# Altium PCB x-IMU3-SA-A8.PcbDoc
Units mm, origin at the board's own origin, x right, y up, seen from the top; angles counter-clockwise.
Board outline 27 x 12.5 mm, 2 copper layers (Top Layer, Bottom Layer), stack 1.569 mm thick; 14 components, 25 nets, 68 pads, 15 vias.
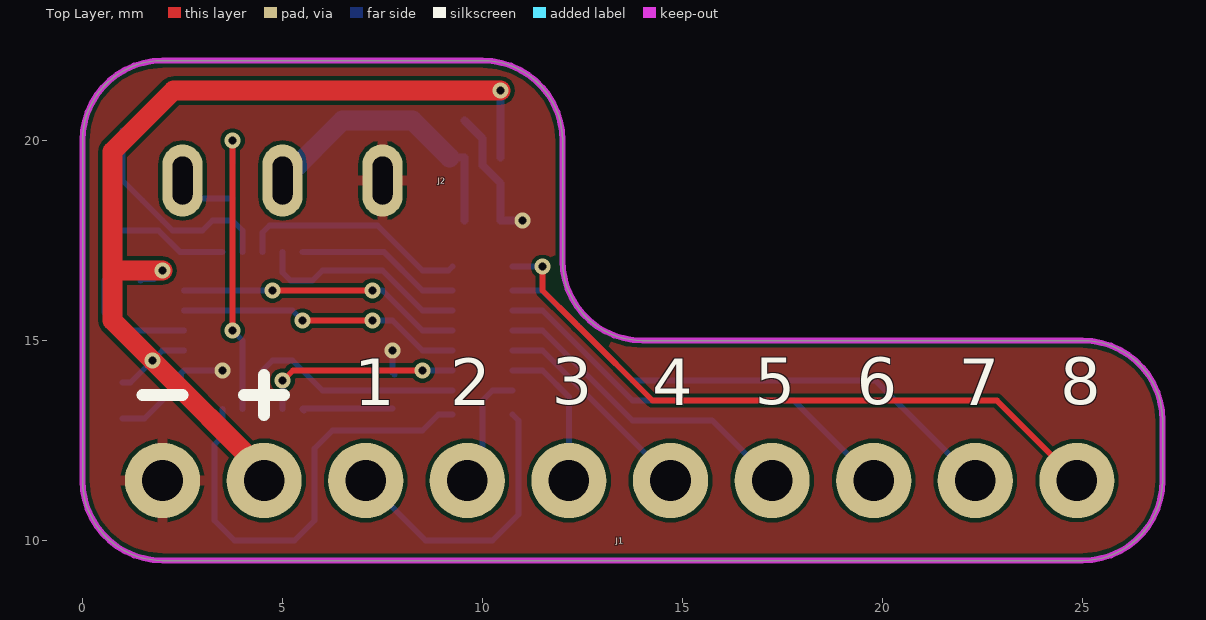
[diagram p0: Top Layer view]
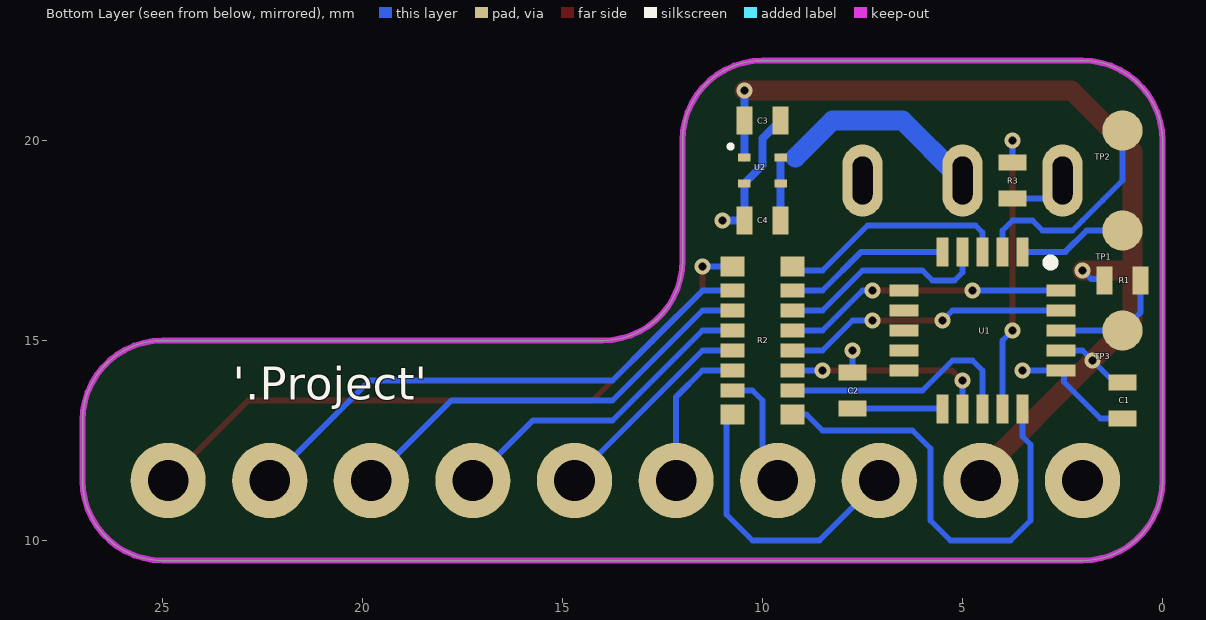
[diagram p1: Bottom Layer view, seen from below]
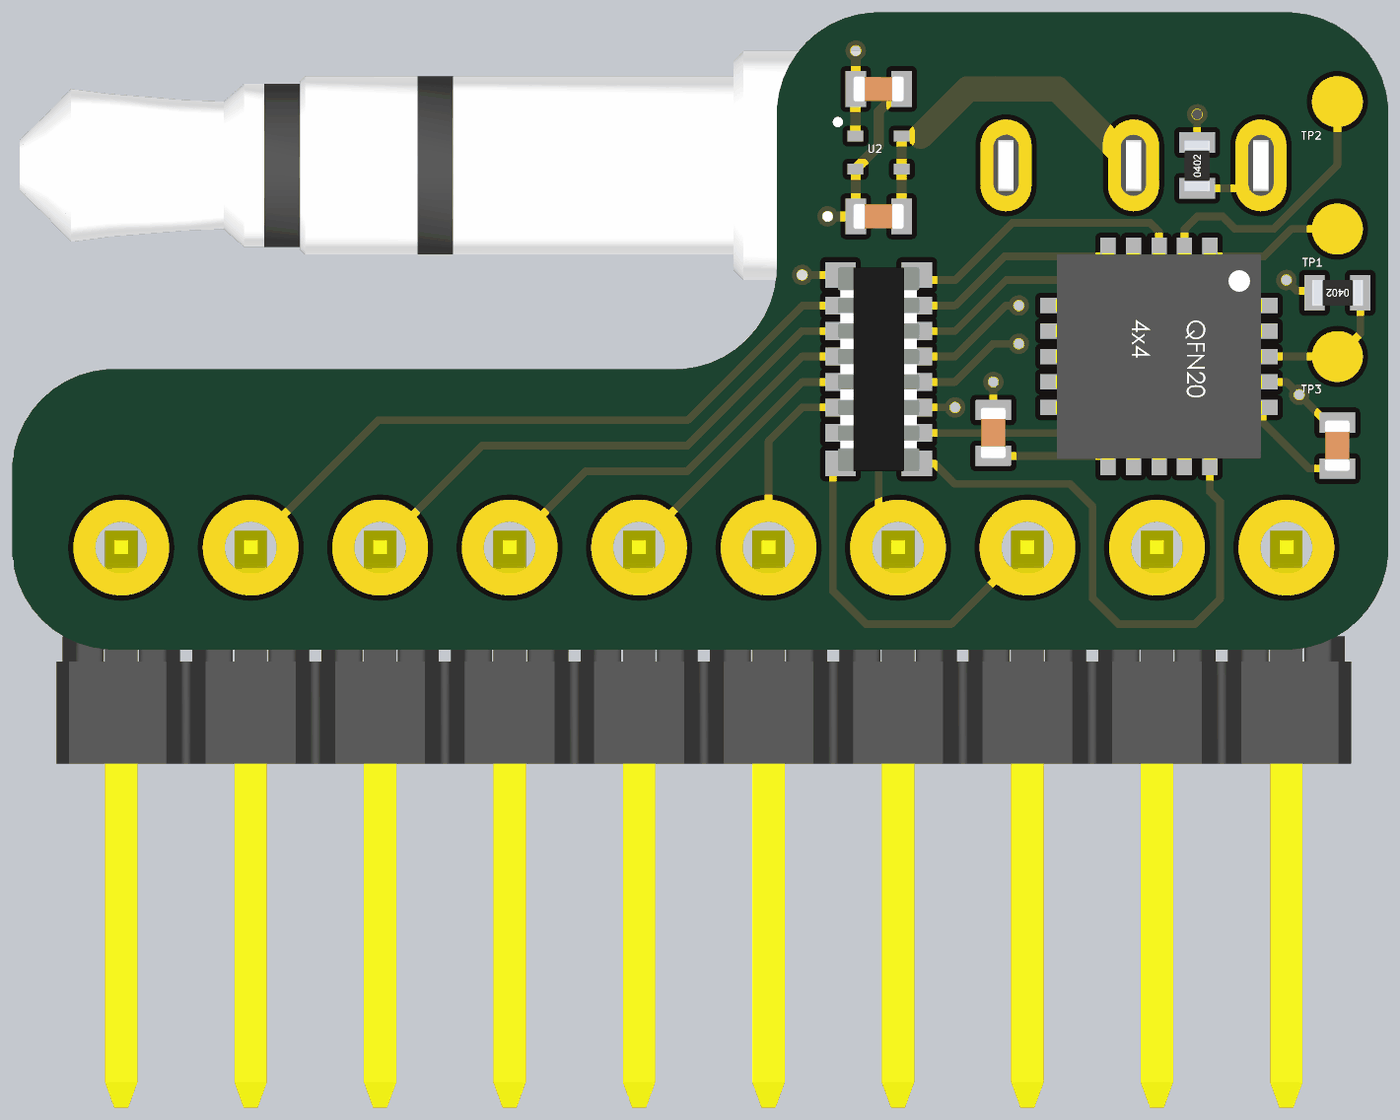
[diagram p2: 3D render of the assembled board from below, using the file's embedded part models]

## Layer stack, top to bottom
Top Solder: solder mask 0.0254, SM-001, Dk 4
Top Layer: signal copper 0.035
Dielectric 1: core 1.4986, Core-043, Dk 4.3
Bottom Layer: signal copper 0.035
Bottom Solder: solder mask 0.0254, SM-001, Dk 4

## Board outline
0,11.5 0,20 cw(c2,20) 2,22 10,22 cw(c10,20) 12,20 12,17 ccw(c14,17) 14,15 25,15 cw(c25,13) 27,13 27,11.5 cw(c25,11.5) 25,9.5 2,9.5 cw(c2,11.5)

## Design rules (kind name [scope] priority, off if disabled: settings)
Clearance [All] p1: gap=0.1 ignorepadtopadclearanceinfootprint=FALSE except(0: Arc-Hole Track-Hole SMDPad-Hole THPad-Hole Via-Hole Fill-Hole Poly-Hole Region-Hole Text-Hole)
DiffPairsRouting [All] p1: maxlimit=0.254 minlimit=0.1 mostfreqgap=0.1 toplayer_minwidth=0.1 toplayer_maxwidth=0.381 toplayer_prefwidth=0.1 bottomlayer_minwidth=0.1 bottomlayer_maxwidth=0.381 bottomlayer_prefwidth=0.1 maxuncoupledlength=12.7
MinimumSolderMaskSliver [All] p1: minsoldermaskwidth=0
PlaneClearance [All] p1: clearance=0.2
PlaneConnect [All] p1: planeconnectstyle=Direct reliefexpansion=0.508 reliefentries=4 reliefconductorwidth=0.254 reliefairgap=0.254
PolygonConnect [All] p1: thpad.connectstyle=Relief thpad.reliefconductorwidth=0.254 thpad.reliefentries=4 thpad.polygonreliefangle="90 Angle" thpad.airgapwidth=0.1 smdpad.connectstyle=Relief smdpad.reliefconductorwidth=0.254 smdpad.reliefentries=4 smdpad.polygonreliefangle="90 Angle" smdpad.airgapwidth=0.1 via.connectstyle=Direct via.reliefconductorwidth=0.254 via.reliefentries=4 via.polygonreliefangle="90 Angle" via.airgapwidth=0.254
RoutingVias [All] p1: holewidth=0.711 width=1.27 viastyle="Through Hole" minholewidth=0.2 minwidth=0.4 maxholewidth=0.711 maxwidth=1.27
SilkToSolderMaskClearance [IsPad] p1: minsilkscreentomaskgap=0.1 clearancetoexposedcopper=TRUE
SolderMaskExpansion [All] p1: expansion=0.102 istentingtop=FALSE
Width [All] p1: maxlimit=1 minlimit=0.1 preferedwidth=0.1
25 further rules are at their usual default settings.

## Components (designator, comment, footprint, x,y, rotation, side; value= is the part's Value field where it differs from the comment)
C1 "100nF" "Capacitor 0402" 1,13.5 r90 bottom
C2 "10uF" "Capacitor 0402" 7.75,13.75 r270 bottom
C3 "10uF" "Capacitor 0402" 10,20.5 r0 bottom
C4 "10uF" "Capacitor 0402" 10,18 r180 bottom
J1 "Molex 90121-0770" "Molex 90121-0770" 2,11.5 r90 top
J2 "SP-3533-02" SP-3533-02 5,19 r180 top
R1 "10kR" "Resistor 0402" 1,16.5 r0 bottom
R2 "YC248-FR-07220RL" YC248 10,15 r0 bottom
R3 "180R" "Resistor 0402" 3.75,19 r90 bottom
TP1 "Test Point" "Test Point 1mm" 1,17.75 r270 bottom
TP2 "Test Point" "Test Point 1mm" 1,20.25 r270 bottom
TP3 "Test Point" "Test Point 1mm" 1,15.25 r270 bottom
U1 "PIC32MM0064GPL020-I/ML" QFN-20 4.5,15.25 r270 bottom
U2 "LP5907SNX-3.0" X2SON 10,19.25 r180 bottom

## Footprints (in the part's own frame and the unit in brackets; to place one, negate y for a bottom-side part, rotate by r counter-clockwise, add the part's x,y. Pads: shape width x height; smd on the part's side, far side on the other; paste and mask are expansions set on the pad)
"Capacitor 0402" [mm]
  rect 0.4x0.7 smd: 1(-0.45,0) 2(0.45,0)
  body extent -0.5,-0.25 0.5,0.25, height 0.48
"Molex 90121-0770" [mil]
  round 74 hole 40: 1(0,0) 2(0,-100) 3(0,-200) 4(0,-300) 5(0,-400) 6(0,-500) 7(0,-600) 8(0,-700) 9(0,-800) 10(0,-900)
  body extent -433,-950 13,50, height 142
QFN-20 [mm]
  rect 0.73x0.3 smd: 1(-1.965,1) 2(-1.965,0.5) 3(-1.965,0) 4(-1.965,-0.5) 5(-1.965,-1) 11(1.965,-1) 12(1.965,-0.5) 13(1.965,0) 14(1.965,0.5) 15(1.965,1)
  rect 0.3x0.73 smd: 6(-1,-1.965) 7(-0.5,-1.965) 8(0,-1.965) 9(0.5,-1.965) 10(1,-1.965) 16(1,1.965) 17(0.5,1.965) 18(0,1.965) 19(-0.5,1.965) 20(-1,1.965)
  silkscreen extent -1.8,1.6 -1.6,1.8, body extent -2.02,-2.02 2.02,2.02, height 0.8
"Resistor 0402" [mm]
  rect 0.4x0.7 smd: 1(-0.45,0) 2(0.45,0)
  body extent -0.51,-0.25 0.49,0.25, height 0.34
SP-3533-02 [mm]
  oval 1x1.8 hole 0.5 slot 1.2 at 90 deg: R(0,0) S(-2.5,0) T(2.5,0)
  body extent -21.85,-2.5 4.75,2.5, height 5
"Test Point 1mm" [mm]
  round 1 smd paste-100: 1(0,0)
X2SON [mm]
  rect 0.31x0.21 smd: 1(-0.455,0.325) 2(-0.455,-0.325) 3(0.455,-0.325) 4(0.455,0.325)
  silkscreen extent -0.85,0.55 -0.75,0.65, body extent -0.5,-0.5 0.5,0.5, height 0.4
YC248 [mm]
  rect 0.6x0.5 smd: 1(-0.75,1.85) 8(-0.75,-1.85) 9(0.75,-1.85) 16(0.75,1.85)
  rect 0.6x0.35 smd: 2(-0.75,1.25) 3(-0.75,0.75) 4(-0.75,0.25) 5(-0.75,-0.25) 6(-0.75,-0.75) 7(-0.75,-1.25) 10(0.75,-1.25) 11(0.75,-0.75) 12(0.75,-0.25) 13(0.75,0.25) 14(0.75,0.75) 15(0.75,1.25)
  body extent -0.8,-2 0.8,2, height 0.45

## Part data
C1 C2 C3 C4: library part Capacitor
R1 R3: library part Resistor
R2: library part "Resistor Array 8"
U2: library part LP5907SNX-X.X

## Via types
v1: diameter 0.4, hole 0.2, Top Layer to Bottom Layer, tented both sides, 15 vias

## Nets (pads, with @x,y where several pads share a name; then routed paths per layer and width w, separated by ;. In a path a pad name is that pad's centre, name@x,y a point inside that pad or via, vN(x,y) a via of type N, cw(c..) or ccw(c..) an arc to the next point about the centre after c; other vN are vias at no path point)
CH1: R2.1 U1.15 | length 11.4
  Bottom Layer w0.15: U1.15 3.5,12.6 3.3,12.4 3.3,10.5 3.8,10 5.3,10 5.8,10.5 5.8,12.3 6.25,12.75 8.5,12.75 8.9,13.15 R2.1
"CH1 R": J1.3 R2.16 | length 7.3
  Bottom Layer w0.15: J1.3 8.58,10 10.25,10 10.9,10.65 10.9,13 R2.16
CH2: R2.2 U1.13 | length 6.1
  Bottom Layer w0.15: U1.13 4.5,14.25 4.75,14.5 5.25,14.5 6,13.75 R2.2
"CH2 R": J1.4 R2.15 | length 3
  Bottom Layer w0.15: J1.4 10,11.88 10,13.5 10.25,13.75 R2.15
CH3: R2.3 U1.12 | length 5.1
  Top Layer w0.15: v1(5,14) 5.013,14 5.263,14.25 v1(8.5,14.25)
  Bottom Layer w0.15: U1.12 v1(5,14) ; v1(8.5,14.25) R2.3
"CH3 R": J1.5 R2.14 | length 3.8
  Bottom Layer w0.15: R2.14 11.5,14.25 12.16,13.59 J1.5
CH4: R2.4 U1.19 | length 7.1
  Top Layer w0.15: v1(5.5,15.5) v1(7.25,15.5)
  Bottom Layer w0.15: U1.19 5.25,15.75 v1(5.5,15.5) ; v1(7.25,15.5) 7.75,15.5 8.5,14.75 R2.4
"CH4 R": J1.6 R2.13 | length 5.3
  Bottom Layer w0.15: R2.13 11.5,14.75 14.7,11.55 J1.6
CH5: R2.5 U1.20 | length 7.1
  Top Layer w0.15: v1(4.75,16.25) v1(7.25,16.25)
  Bottom Layer w0.15: U1.20 v1(4.75,16.25) ; v1(7.25,16.25) 7.5,16.25 8.5,15.25 R2.5
"CH5 R": J1.7 R2.12 | length 8
  Bottom Layer w0.15: R2.12 11.5,15.25 13.75,13 15.74,13 J1.7
CH6: R2.6 U1.4 | length 5.4
  Bottom Layer w0.15: U1.4 5,16.7 5.2,16.5 5.75,16.5 6,16.75 7.5,16.75 8.5,15.75 R2.6
"CH6 R": J1.8 R2.11 | length 10.8
  Bottom Layer w0.15: R2.11 11.5,15.75 13.75,13.5 17.78,13.5 J1.8
CH7: R2.7 U1.5 | length 4.1
  Bottom Layer w0.15: U1.5 7.535,17.215 8.5,16.25 R2.7
"CH7 R": J1.9 R2.10 | length 13.5
  Bottom Layer w0.15: R2.10 11.5,16.25 11.5,16.247 12.756,14.991 12.759,14.991 13.75,14 19.82,14 J1.9
CH8: R2.8 U1.3 | length 5.8
  Bottom Layer w0.15: U1.3 4.5,17.7 4.675,17.875 7.375,17.875 8.5,16.75 9.15,16.75 R2.8
"CH8 R": J1.10 R2.9 | length 16.7
  Top Layer w0.15: v1(11.5,16.85) 11.5,16.25 12.309,15.441 ccw(c14,17) 12.441,15.309 14.25,13.5 22.86,13.5 J1.10
  Bottom Layer w0.15: R2.9 v1(11.5,16.85)
GND: C1.1 C2.1 C3.1 C4.1 J1.1 J2.S U1.16 U2.2 | length 7.2
  Bottom Layer w0.15: C1.1 1.55,13.05 2.463,13.963 2.463,14.178 U1.16 v1(3.5,14.25) ; v1(7.75,14.75) C2.1 C2.1@7.8,14.15
  Bottom Layer w0.2: C3.1 10,20.05 10,19.38 U2.2 10.45,18.92 C4.1 v1(11,18)
MCLR: R1.1 TP3.1 U1.18 | length 3
  Bottom Layer w0.15: R1.1 0.55,15.7 TP3.1 U1.18
PGEC: TP2.1 U1.2 | length 5.5
  Bottom Layer w0.15: TP2.1 1,19 1.5,18.5 2,18 2.25,17.75 3,17.75 3.25,18 3.75,18 4,17.75 U1.2
PGED: TP1.1 U1.1 | length 2.7
  Bottom Layer w0.15: TP1.1 1.896,17.75 2.431,17.215 U1.1
TX: R3.2 U1.14 | length 7.4
  Top Layer w0.15: v1(3.75,15.25) v1(3.75,20)
  Bottom Layer w0.15: v1(3.75,15.25) 4,15 U1.14 ; R3.2 v1(3.75,20)
"TX R": J2.T R3.1 | length 1.4
  Bottom Layer w0.15: J2.T 2.95,18.55 R3.1
VCAP: C2.2 U1.11 | length 2.3
  Bottom Layer w0.15: U1.11@5.535,13.25 U1.11 5.515,13.3 C2.2
VDD: C1.2 C3.2 J1.2 R1.2 U1.17 U2.1 | length 25.6
  Top Layer w0.5: v1(2,16.75) 0.75,16.75 ; J1.2 4.54,11.71 v1(1.75,14.5) 0.75,15.5 0.75,16.75 ; v1(10.45,21.25) 2.275,21.25 0.75,19.725 0.75,16.75
  Bottom Layer w0.15: C1.2 1.2,13.95 v1(1.75,14.5) 2,14.75 U1.17 ; R1.2 1.487,16.537 1.787,16.537 v1(2,16.75)
  Bottom Layer w0.2: v1(10.45,21.25) C3.2 10.455,20.495 U2.1
VIN: C4.2 J2.R U2.3 U2.4 | length 7.4
  Bottom Layer w0.2: 9.175,19.575 U2.4 9.55,19.57 9.55,18.925 C4.2
  Bottom Layer w0.5: J2.R@5,19.265 J2.R 5.132,19.132 6.5,20.5 8.25,20.5 9.175,19.575
pads on no net: U1.6 U1.7 U1.8 U1.9 U1.10

## Polygon pours and split planes (outlines as drawn)
GND on Top Layer "GND_L01_P000" (solid, remove dead copper, pour order 0): 0,9.5 0,22 27.25,22 27.25,9.5

## Keep-outs
Keep-Out Layer:
  the board outline again, w0.15

## Silkscreen, mask and mechanical layers (free items; w line width, h text height)
Top Overlay:
  lines w0.3: 1.5,13.642 2.5,13.642 ; 4.04,13.642 5.04,13.642 ; 4.54,13.142 4.54,14.142
  text "3" at 11.735,13.022 h2
  text "5" at 16.81,13.022 h2
  text "6" at 19.353,13.022 h2
  text "8" at 24.439,13.023 h2
  text "1" at 6.799,13 h2
  text "2" at 9.19,13 h2
  text "4" at 14.24,13 h2
  text "7" at 21.901,13 h2
Bottom Overlay:
  text "'.Project'" at 23.25,13.25 h1.4